# Altium PCB SPECCY2007.PcbDoc (part 1 of 2)
Units mil, origin at the board's own origin, x right, y up, seen from the top; angles counter-clockwise.
Board outline 6000 x 4400 mil, 2 copper layers (Top Layer, Bottom Layer); 54 components, 103 nets, 437 pads, 186 vias.
Unrouted connection lines stored in the file: 2.
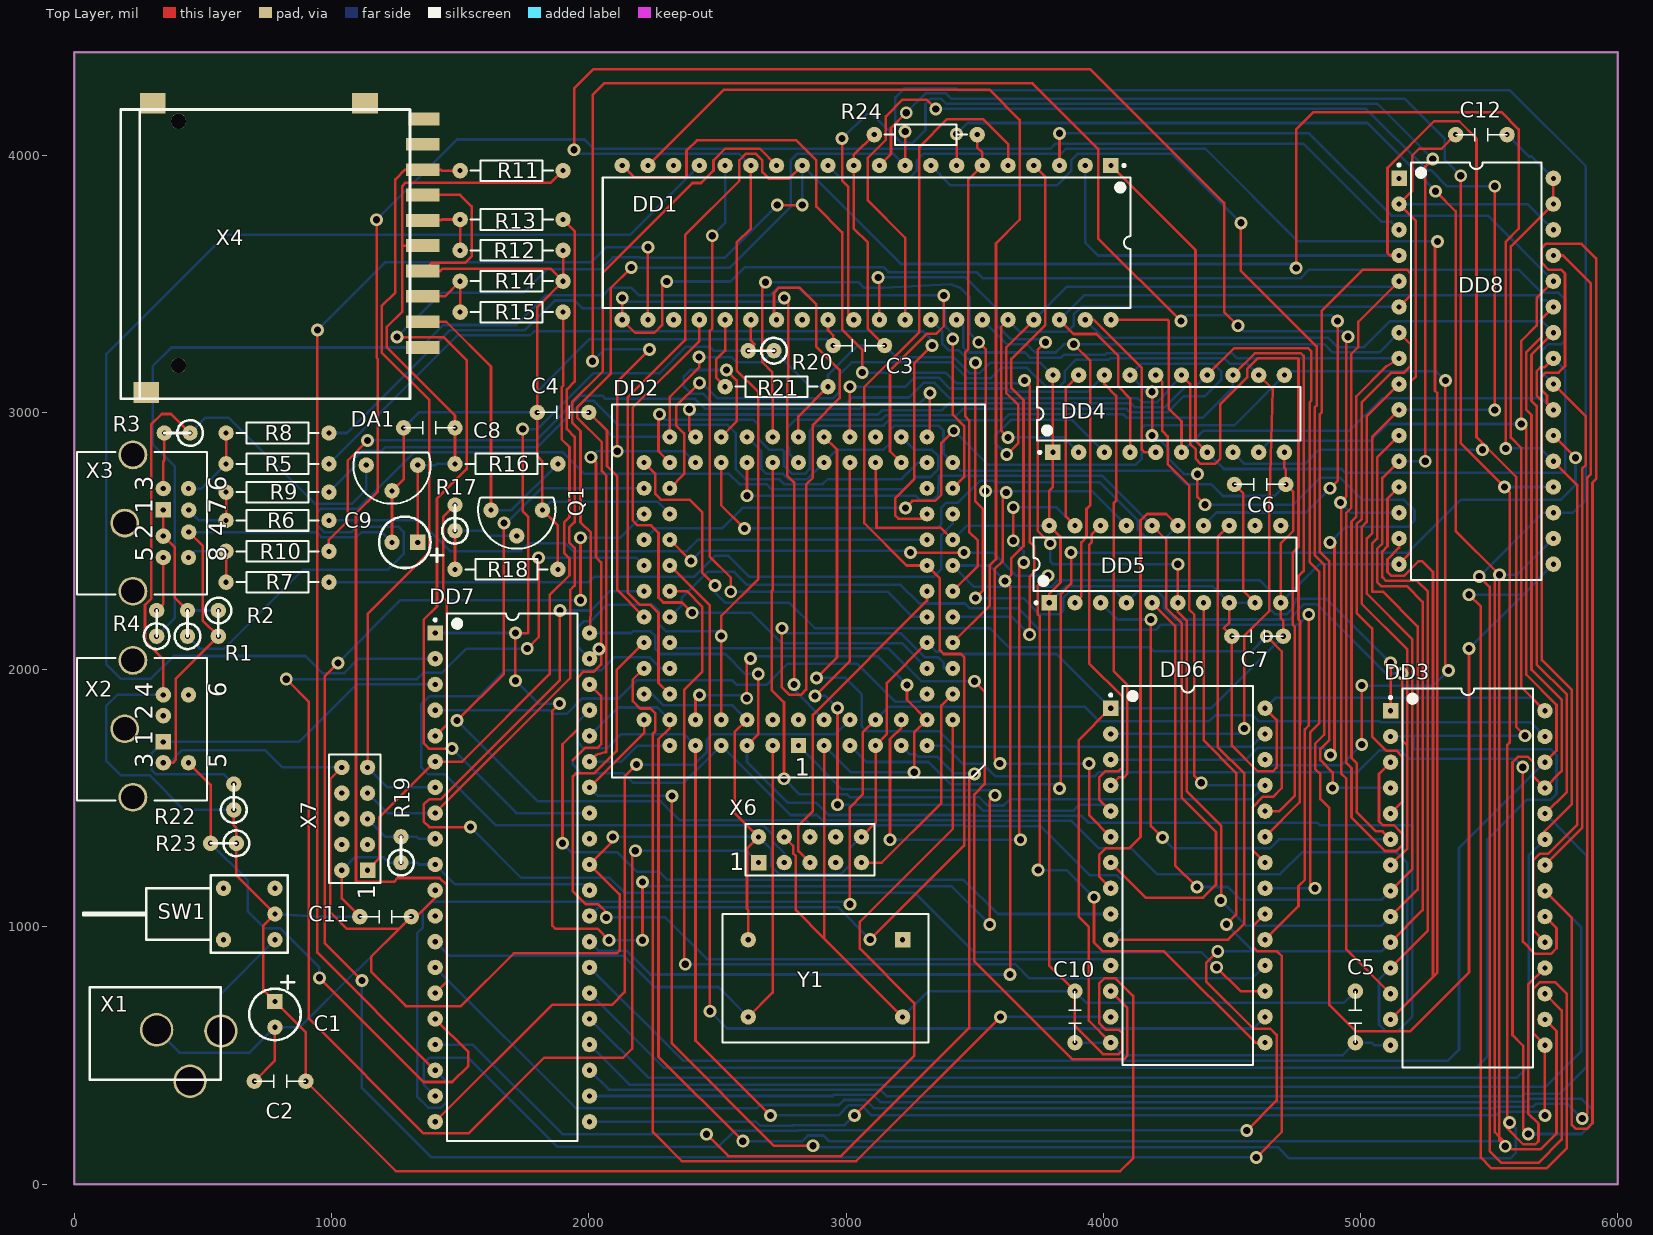
[diagram p0: Top Layer view]
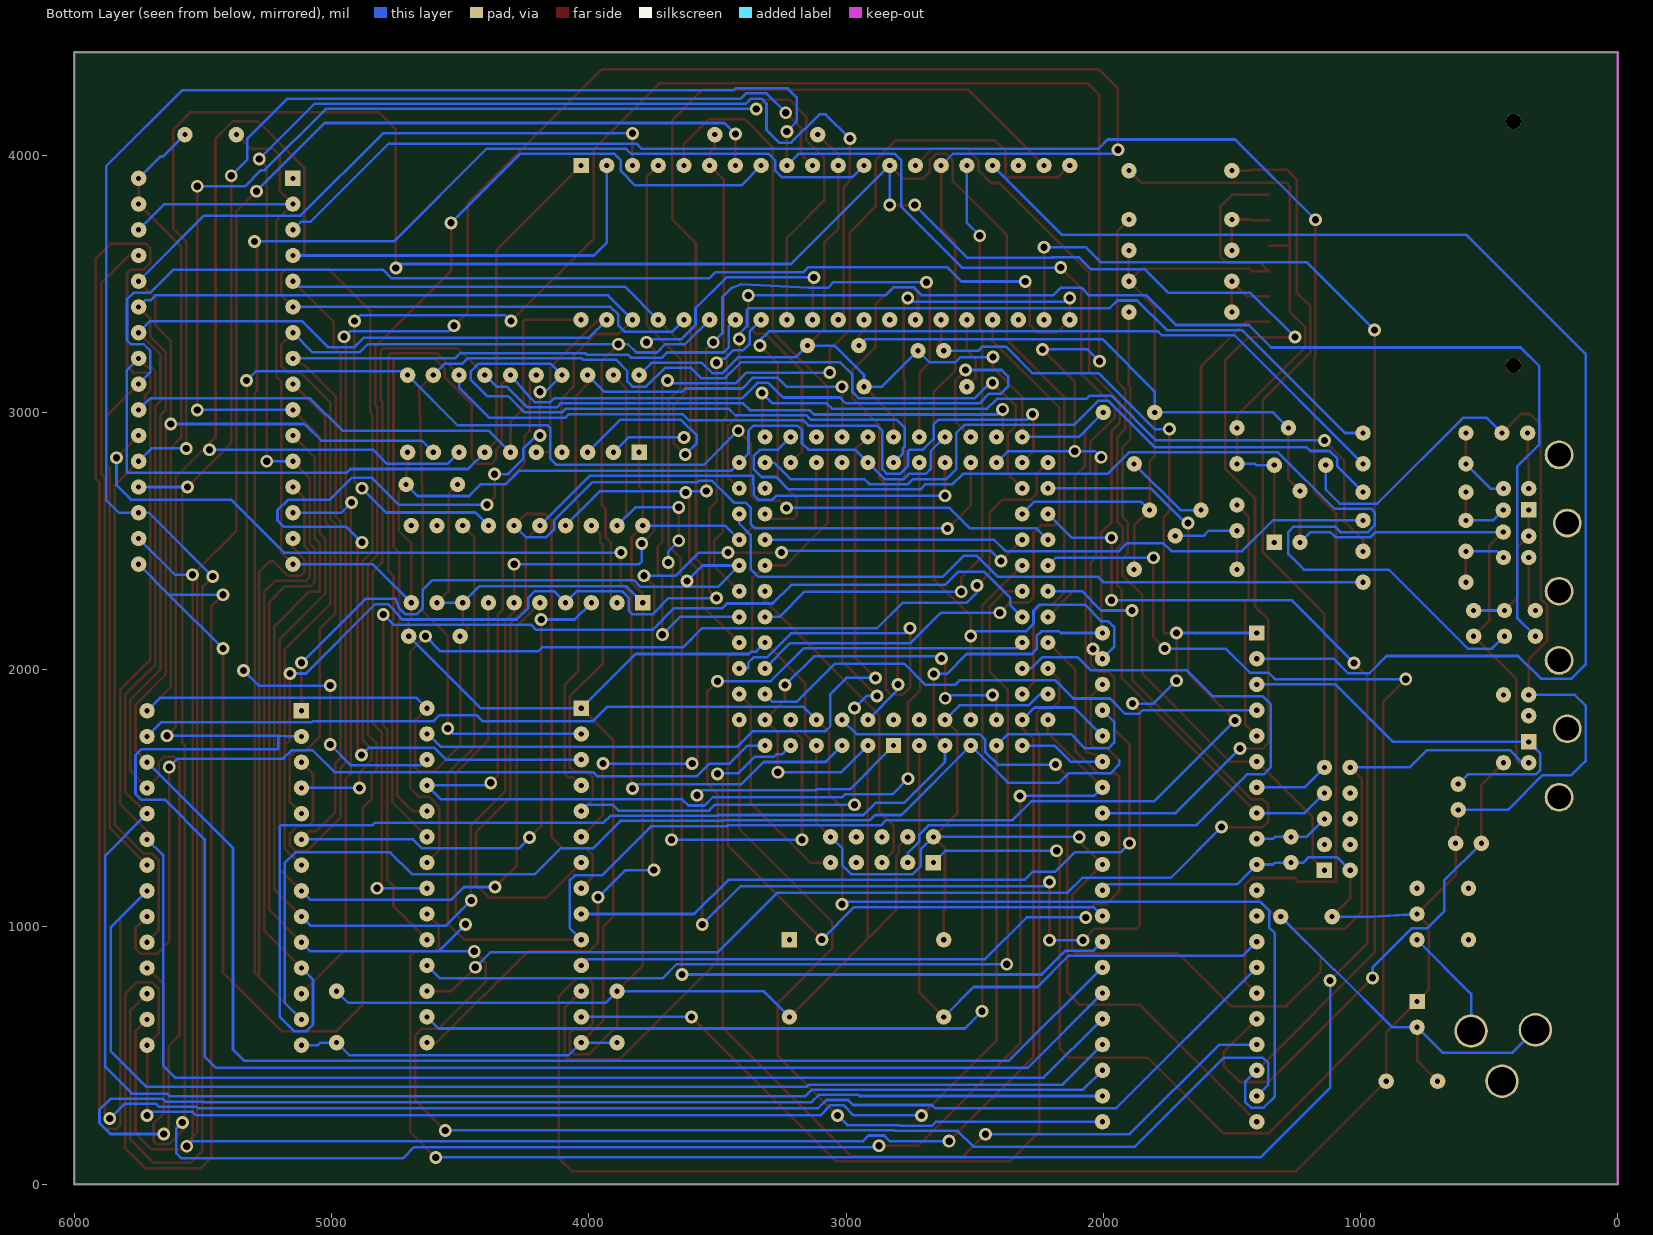
[diagram p1: Bottom Layer view, seen from below]
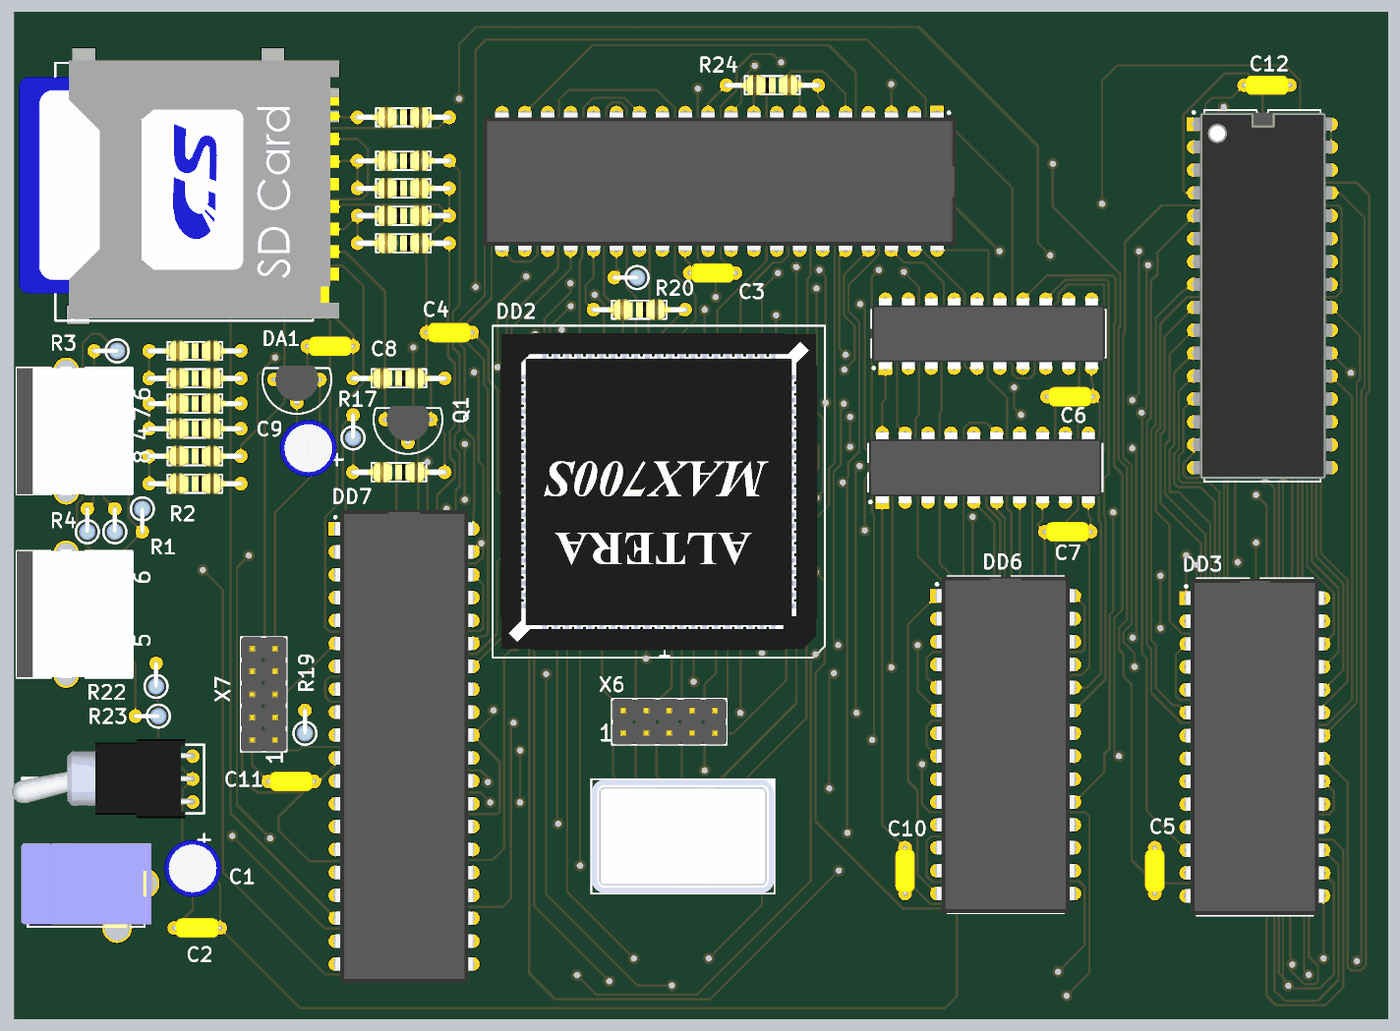
[diagram p3: 3D render of the assembled board from above, using the file's embedded part models]

## Layer stack, top to bottom
Top Layer: signal copper 1.4
Dielectric: dielectric 12.6, FR-4, Dk 4.8
Bottom Layer: signal copper 1.4

## Board outline
0,0 0,4400 6000,4400 6000,0 0,0

## Design rules (kind name [scope] priority, off if disabled: settings)
Clearance [All] p1: gap=10
HoleSize [All] p1: absolutevalues=TRUE maxlimit=200 minlimit=1 maxpercent=80.000 minpercent=20.000
HoleToHoleClearance [All] p1: gap=10 allowstackedmicrovias=FALSE
PlaneConnect [All] p1: planeconnectstyle=Direct reliefexpansion=20 reliefentries=4 reliefconductorwidth=10 reliefairgap=10
PolygonConnect [All] p1: connectstyle=Direct reliefconductorwidth=10 reliefentries=4 polygonreliefangle="90 Angle" airgapwidth=10
RoomDefinition SPECCY2007 [InComponentClass('SPECCY2007')] p1: confinementstyle=ConfineIn formatcopy=TRUE lockcomponents=FALSE outline -100,0 6000,0 6000,4400 -100,4400
RoutingVias [All] p1: holewidth=28 width=50 viastyle="Through Hole" minholewidth=28 minwidth=50 maxholewidth=28 maxwidth=50
SMDNeckDown [All] p1: percent=50.000
SilkToSolderMaskClearance SilkscreenOverComponentPads [IsPad] p1: minsilkscreentomaskgap=10 clearancetoexposedcopper=TRUE
SolderMaskExpansion [All] p1: expansion=4
Width [All] p1: maxlimit=10 minlimit=10 preferedwidth=10
24 further rules are at their usual default settings.

## Components (designator, comment, footprint, x,y, rotation, side; value= is the part's Value field where it differs from the comment)
C1 "47,0" CAPPOL_2.54#1 780,660 r270 top
C2 "0,1" CAP_5.08-7.8x3.2 800,400 r180 top
C3 "0,1" CAP_5.08-7.8x3.2 3050,3260 r180 top
C4 "0,1" CAP_5.08-7.8x3.2 1900,3000 r180 top
C5 "0,1" CAP_5.08-7.8x3.2 4980,650 r270 top
C6 "0,1" CAP_5.08-7.8x3.2 4610,2720 r0 top
C7 "0,1" CAP_5.08-7.8x3.2 4600,2130 r0 top
C8 "0,1" CAP_5.08-7.8x3.2 1380,2940 r180 top
C9 "47,0" CAPPOL_2.54#2 1280,2500 r180 top
C10 "0,1" CAP_5.08-7.8x3.2 3890,650 r270 top
C11 "0,1" CAP_5.08-7.8x3.2 1210,1040 r0 top
C12 "0,1" CAP_5.08-7.8x3.2 5470,4080 r180 top
DA1 "LP2950" TO92#1 1240,2740 r90 top
DD1 "Z80A" DIP-40 3080,3660 r180 top
DD2 "EPM7128S/PLCC" PLCC84-Socket+AlteraMAX700S 2820,2300 r90 top
DD3 "CY62256" DIP-28W 5417,1190.16 r270 top
DD4 "74HCT245" DIP-20 4254.29,2995 r0 top
DD5 "74HCT245" DIP-20 4240,2410 r0 top
DD6 "CY62256" DIP-28W 4329,1200.16 r270 top
DD7 "ATMEGA16" DIP-40 1703,1192.48 r270 top
DD8 "AT29C020" DIP-32/D41.2 5450,3160 r270 top
Q1 "BC557" TO92#2 1720,2570 r90 top
R1 "4K7" RES-2.54 440,2180 r90 top
R2 "2K2" RES-2.54 560,2180 r270 top
R3 "100" RES-2.54 400,2920 r180 top
R4 "330" RES-2.54 320,2180 r90 top
R5 "470" RES_10.16 790,2800 r180 top
R6 "470" RES_10.16 790,2580 r180 top
R7 "470" RES_10.16 790,2340 r180 top
R8 "330" RES_10.16 790,2920 r180 top
R9 "330" RES_10.16 790,2690 r180 top
R10 "330" RES_10.16 790,2460 r180 top
R11 "10K" RES_10.16 1700,3940 r180 top
R12 "2K2" RES_10.16 1700,3630 r0 top
R13 "1K" RES_10.16 1700,3750 r180 top
R14 "2K2" RES_10.16 1700,3510 r0 top
R15 "1K" RES_10.16 1700,3390 r180 top
R16 "10K" RES_10.16 1680,2800 r180 top
R17 "2K2" RES-2.54 1480,2590 r90 top
R18 "2K2" RES_10.16 1680,2390 r180 top
R19 "10K" RES-2.54 1270,1300 r90 top
R20 "10K" RES-2.54 2670,3240 r180 top
R21 "10K" RES_10.16 2730,3100 r180 top
R22 "4K7" RES-2.54 620,1505 r90 top
R23 "4K7" RES-2.54 580,1325 r180 top
R24 "2K2" RES_10.16 3310,4080 r0 top
SW1 "SW_T_SPDT" SW_T_SPDT 680,1040 r180 top locked
X1 "X3" "CONN JACK PWR" 420,500 r180 top locked
X2 "X6" Mini-DIN6 320,1770 r0 top locked
X3 "X8" Mini-DIN8 320,2570 r0 top locked
X4 "X9" "SD Card socket" 820,3640 r270 top locked
X6 "X10" "Double row pin strip 5 way" 2860,1300 r0 top
X7 "X10" "Double row pin strip 5 way" 1090,1420 r90 top
Y1 "14MHz" OSC14 2920,800 r180 top

## Footprints (in the part's own frame and the unit in brackets; to place one, negate y for a bottom-side part, rotate by r counter-clockwise, add the part's x,y. Pads: shape width x height; smd on the part's side, far side on the other; paste and mask are expansions set on the pad)
CAP_5.08-7.8x3.2 [mil] "Capacitor, Ceramic, Thru-Hole, Dipped Radial; Body 7.8 x 3.2 mm (WxT) Pin Spacing 5.08 mm (typ)"
  round 60 hole 20: 1(-100,0) 2(100,0)
  silkscreen extent -100,-25 100,25, body extent -110,-42 110,43, height 170
CAPPOL_2.54#1 [mil]
  round 60 hole 20: MINUS(50,0)
  rect 60x60 hole 20: PLUS(-50,0)
  silkscreen extent -150,-100 100,100, body extent -125,-125 125,125, height 454
CAPPOL_2.54#2 [mil]
  round 60 hole 20: MINUS(45,5)
  rect 60x60 hole 20: PLUS(-55,5)
  silkscreen extent -155,-95 95,105, body extent -130,-120 120,130, height 454
"CONN JACK PWR" [mil] "Разъем питания (штекер)"
  round 130 hole 110: 1(100,-100) 2(-30,100) 3(-150,-95)
  silkscreen extent -150,-265 360,95, body extent -188,-270 388,100, height 126
DIP-20 [mil] "DIP, 20-Pin, Row Spacing 7.62 mm, Pitch 2.54 mm"
  rect 60x60 hole 20: 1(-450,-150)
  round 60 hole 20: 2(-350,-150) 3(-250,-150) 4(-150,-150) 5(-50,-150) 6(50,-150) 7(150,-150) 8(250,-150) 9(350,-150) 10(450,-150) 11(450,150) 12(350,150) 13(250,150) 14(150,150) 15(50,150) 16(-50,150) 17(-150,150) 18(-250,150) 19(-350,150) 20(-450,150)
  silkscreen extent -512,-155 512,104, body extent -507,-155 508,155, height 185
DIP-28W [mil] "DIP, 28-Leads, Row Spacing 15.24mm, Pitch 2.54mm, Body 37x13.3mm, Window"
  rect 60x60 hole 20: 1(-650,-300)
  round 60 hole 20: 2(-550,-300) 3(-450,-300) 4(-350,-300) 5(-250,-300) 6(-150,-300) 7(-50,-300) 8(50,-300) 9(150,-300) 10(250,-300) 11(350,-300) 12(450,-300) 13(550,-300) 14(650,-300) 15(650,300) 16(550,300) 17(450,300) 18(350,300) 19(250,300) 20(150,300) 21(50,300) 22(-50,300) 23(-150,300) 24(-250,300) 25(-350,300) 26(-450,300) 27(-550,300) 28(-650,300)
  silkscreen extent -736,-305 736,254, body extent -735,-305 735,305, height 225
DIP-32/D41.2 [mil] "DIP, Ceramic, 32-Pin, Row Spacing 15.24 mm, Pitch 2.54 mm"
  rect 60x60 hole 20: 1(-750,-300)
  round 60 hole 20: 2(-650,-300) 3(-550,-300) 4(-450,-300) 5(-350,-300) 6(-250,-300) 7(-150,-300) 8(-50,-300) 9(50,-300) 10(150,-300) 11(250,-300) 12(350,-300) 13(450,-300) 14(550,-300) 15(650,-300) 16(750,-300) 17(750,300) 18(650,300) 19(550,300) 20(450,300) 21(350,300) 22(250,300) 23(150,300) 24(50,300) 25(-50,300) 26(-150,300) 27(-250,300) 28(-350,300) 29(-450,300) 30(-550,300) 31(-650,300) 32(-750,300)
  silkscreen extent -811,-305 811,254, body extent -800,-300 800,305, height 240
DIP-40 [mil] "DIP, 40-Pin, Row Spacing 15.24 mm, Pitch 2.54 mm"
  rect 60x60 hole 20: 1(-950,-300)
  round 60 hole 20: 2(-850,-300) 3(-750,-300) 4(-650,-300) 5(-550,-300) 6(-450,-300) 7(-350,-300) 8(-250,-300) 9(-150,-300) 10(-50,-300) 11(50,-300) 12(150,-300) 13(250,-300) 14(350,-300) 15(450,-300) 16(550,-300) 17(650,-300) 18(750,-300) 19(850,-300) 20(950,-300) 21(950,300) 22(850,300) 23(750,300) 24(650,300) 25(550,300) 26(450,300) 27(350,300) 28(250,300) 29(150,300) 30(50,300) 31(-50,300) 32(-150,300) 33(-250,300) 34(-350,300) 35(-450,300) 36(-550,300) 37(-650,300) 38(-750,300) 39(-850,300) 40(-950,300)
  silkscreen extent -1026,-305 1026,254, body extent -1032,-305 1032,305, height 224
"Double row pin strip 5 way" [mil] "Гребенка на 10 контактов"
  rect 60x60 hole 20: 1(-200,-50)
  round 60 hole 20: 2(-200,50) 3(-100,-50) 4(-100,50) 5(0,-50) 6(0,50) 7(100,-50) 8(100,50) 9(200,-50) 10(200,50)
  silkscreen extent -250,-100 250,100, body extent -250,-100 250,100, height 398
Mini-DIN6 [mil] "Штекер Mini-DIN 6 pin"
  rect 60x60 hole 20: 1(26,-51)
  round 60 hole 20: 2(26,51) 3(26,-132) 4(26,132) 5(124,-132) 6(124,132)
  round 112 / inner round 60 / far side round 112 hole 91: M1(-92,-266) M2(-124,0) M3(-92,266)
  silkscreen extent -309,-278 196,276, body extent -309,-282 203,282, height 518
Mini-DIN8 [mil] "Разъем Mini-DIN 8 pin"
  rect 60x60 hole 20: 1(26,51)
  round 60 hole 20: 2(26,-51) 3(26,134) 4(125,-35) 5(26,-134) 6(124,134) 7(125,50) 8(124,-134)
  round 112 / inner round 60 / far side round 112 hole 91: M1(-92,-265) M2(-124,0) M3(-92,265)
  silkscreen extent -309,-277 196,277, body extent -309,-282 203,282, height 518
OSC14 [mil] "Генератор"
  rect 60x60 hole 20: 1(-300,-150)
  round 60 hole 20: 7(300,-150) 8(300,150) 14(-300,150)
  silkscreen extent -400,-250 400,250, body extent -399,-248 399,248, height 193
PLCC84-Socket+AlteraMAX700S [mil] "Панелька для PLCC84"
  rect 58x58 hole 20: 1(-595,5)
  round 58 hole 20: 2(-495,5) 3(-595,-95) 4(-495,-95) 5(-595,-195) 6(-495,-195) 7(-595,-295) 8(-495,-295) 9(-595,-395) 10(-495,-395) 11(-595,-495) 12(-495,-595) 13(-495,-495) 14(-395,-595) 15(-395,-495) 16(-295,-595) 17(-295,-495) 18(-195,-595) 19(-195,-495) 20(-95,-595) 21(-95,-495) 22(5,-595) 23(5,-495) 24(105,-595) 25(105,-495) 26(205,-595) 27(205,-495) 28(305,-595) 29(305,-495) 30(405,-595) 31(405,-495) 32(505,-595) 33(605,-495) 34(505,-495) 35(605,-395) 36(505,-395) 37(605,-295) 38(505,-295) 39(605,-195) 40(505,-195) 41(605,-95) 42(505,-95) 43(605,5) 44(505,5) 45(605,105) 46(505,105) 47(605,205) 48(505,205) 49(605,305) 50(505,305) 51(605,405) 52(505,405) 53(605,505) 54(505,605) 55(505,505) 56(405,605) 57(405,505) 58(305,605) 59(305,505) 60(205,605) 61(205,505) 62(105,605) 63(105,505) 64(5,605) 65(5,505) 66(-95,605) 67(-95,505) 68(-195,605) 69(-195,505) 70(-295,605) 71(-295,505) 72(-395,605) 73(-395,505) 74(-495,605) 75(-595,505) 76(-495,505) 77(-595,405) 78(-495,405) 79(-595,305) 80(-495,305) 81(-595,205) 82(-495,205) 83(-595,105) 84(-495,105)
  silkscreen extent -720,-720 730,730, body extent -687,-687 697,697, height 349
RES-2.54 [mil] "Резистор вертикально"
  round 60 hole 20: 1(-50,0) 2(50,0)
  silkscreen extent -100,-50 50,50, body extent -86,-36 60,36, height 287
RES_10.16 [mil] "Резистор, Thru-Hole; 2 Leads; 0.4 in Pin Spacing"
  round 60 hole 20: 1(-200,0) 2(200,0)
  silkscreen extent -160,-40 160,40, body extent -212,-45 212,46, height 116
"SD Card socket" [mil] "Разъем SD карты"
  rect 50x130 smd: 1(287.5,535) 2(188.5,535) 3(90.5,535) 4(-8.5,535) 5(-106.5,535) 6(-205.5,535) 7(-303.5,535) 8(-402.5,535) 9(387.5,535)
  rect 50x120 smd: 10(-500.5,540)
  rect 80x100 smd: 11(-562.5,310) 12(-562.5,-515) 13(562.5,-540)
  round 60 hole 60: 14(457.5,-415) 15(-492.5,-415)
  silkscreen extent -538,-640 588,485, body extent -547,-798 579,600, height 118
SW_T_SPDT [mil] "Кнопка питания на плату"
  round 60 hole 20: 1(-100,90) 2(-100,-10) 3(-100,-110) 4(100,-110) 5(100,90)
  silkscreen extent -150,-160 645,140, body extent -111,-185 688,161, height 288
TO92#1 [mil] "TO, Flat Index; 3 In-Line, Axial Leads; Body Dia. 4.8mm; Leads 0.48 x 0.5 mm (max)"
  round 60 hole 20: 1(55,-95) 2(-45,5) 3(55,105)
  silkscreen extent -95,-145 105,155, body extent -56,-105 115,115, height 315
TO92#2 [mil] "TO, Flat Index; 3 In-Line, Axial Leads; Body Dia. 4.8mm; Leads 0.48 x 0.5 mm (max)"
  round 60 hole 20: 1(50,-100) 2(-50,0) 3(50,100)
  silkscreen extent -100,-150 100,150, body extent -61,-110 110,110, height 315

## Part data
C1 C9: library part "C POL"
C2 C3 C4 C5 C6 C7 C8 C10 C11 C12: library part C
Q1: library part "TRANS NPN"
R1 R2 R3 R4 R5 R6 R7 R8 R9 R10 R11 R12 R13 R14 R15 R16 R17 R18 R19 R20 R21 R22 R23 R24: library part R
X4: "SD Card socket"
Y1: library part OSC14

## Via types
v1: diameter 50, hole 28, Top Layer to Bottom Layer, tented both sides, 186 vias

## Nets (pads, with @x,y where several pads share a name; then routed paths per layer and width w, separated by ;. In a path a pad name is that pad's centre, name@x,y a point inside that pad or via, vN(x,y) a via of type N, cw(c..) or ccw(c..) an arc to the next point about the centre after c; other vN are vias at no path point)
A0: DD1.30 DD3.10 DD5.7 DD7.19 DD8.12 | length 13800.6
  Top Layer w10: v1(2985,4065) 2985,3901 3008,3878 3008,3382 DD1.30@3030,3360 ; DD5.7@4390,2260 4390,1726 4517,1599 4517,1048 v1(4479,1010) ; v1(4445,905) 4400,860 4400,788 4584,604 4650,604 4674,580 4674,325 v1(4558,209) ; DD3.10@5117,940.16 5242,1065.16 5242,2263 5180,2325 5080,2325 5065,2340 5065,2470 5085,2490 5085,2745 DD8.12@5150,2810 ; v1(5252,2810) 5252,3956 v1(5281,3985)
  Bottom Layer w10: DD7.19@1403,342.48 1358,387.48 1358,470 1380,492 1531,492 1877,146 2505,146 2566,207 2812,207 2814,209 v1(4558,209) ; v1(2985,4065) 3079,4159 3103,4159 3213,4049 3260,4049 3309,4098 3309,4200 3329,4220 3369,4220 3389,4200 5066,4200 v1(5281,3985) ; v1(4445,905) 4584,905 ; v1(4479,1010) 4584,905 ; DD3.10@5117,940.16 5081.84,905 ; DD8.12@5150,2810 v1(5252,2810) ; 4584,905 5081.84,905 ; 4584,905 5081.84,905
A1: DD1.31 DD3.9 DD5.6 DD8.11 | length 6491.4
  Top Layer w10: v1(3125,3525) 3130,3520 DD1.31@3130,3360 ; v1(3775,3273) 3745,3243 3745,2540 v1(3794,2491) ; v1(4290,2410) DD5.6@4290,2260 4290,2225 4325,2190 4325,1527 4458.33,1393.67 4458.33,1104.33 v1(4457,1103) ; DD3.9@5117,1040.16 5222,1145.16 5222,2168 5086.86,2303.14 5046.86,2303.14 5045,2305 5045,2490 5065,2510 5065,2825 DD8.11@5150,2910
  Bottom Layer w10: v1(3125,3525) 3465,3525 3585,3405 3585,3340 3640,3285 3763,3285 v1(3775,3273) ; v1(3794,2491) 3794,2420 3804,2410 v1(4290,2410) ; v1(4457,1103) 4555,1005 5081.84,1005 DD3.9@5117,1040.16
A2: DD1.32 DD3.8 DD5.5 DD8.10 | length 8650.1
  Top Layer w10: DD1.32@3230,3360 3230,3679 3085,3824 3085,3990 3155,4060 3155,4151 3220,4216 3313,4216 v1(3349,4180) ; DD5.5@4190,2260 4279.5,2170.5 4279.5,1239.5 v1(4364,1155) ; DD3.8@5117,1140.16 5202,1225.16 5202,2118.06 5025,2295.06 5025,2510 5045,2530 5045,2905 DD8.10@5150,3010 ; v1(5522,3010) v1(5522,3879)
  Bottom Layer w10: v1(3349,4180) 5021.57,4180 5260,3941.57 5273.43,3941.57 5336,3879 v1(5522,3879) ; v1(4364,1155) 4485.05,1155 4535.05,1105 5081.84,1105 DD3.8@5117,1140.16 ; DD8.10@5150,3010 v1(5522,3010)
A3: DD1.33 DD3.7 DD5.4 DD8.9 | length 5925.1
  Top Layer w10: v1(3503,2278) 3532.39,2307.39 3532.39,2624.61 3503,2654 v1(3503,3193) ; DD3.7@5117,1240.16 5182,1305.16 ; DD8.9@5150,3110 5024.16,2984.16 5024.16,2574.16 5005,2555 5005,2255.92 5182,2078.92 5182,1985 5182,1705.16 ; v1(5162,1985) 5162,1725.16 5182,1705.16 ; 5182,1305.16 5182,1705.16 ; 5182,1305.16 5182,1705.16
  Bottom Layer w10: DD1.33@3330,3360 3375,3315 3375,3266 3400,3241 3439,3241 3472,3208 3488,3208 v1(3503,3193) ; v1(3503,2278) 3690,2278 3753,2215 3830,2215 3845,2230 3845,2280 3870,2305 4045,2305 DD5.4@4090,2260 4135,2305 4210,2305 4235,2280 4235,2240 4280,2195 4726,2195 4759,2234 4780,2255 4830,2255 5100,1985 v1(5162,1985)
A4: DD1.34 DD3.6 DD5.3 DD8.8 | length 5882.7
  Top Layer w10: v1(4185,2195) 4185,1392 v1(4230,1347) ; DD3.6@5117,1340.16 5085.71,1371.45 5060,1371.45 4985,1446.45 4985,1636.85 4965,1656.85 4965,2576 4984.16,2595.16 4984.16,3062.87 5100,3178.71 DD8.8@5150,3210
  Bottom Layer w10: DD1.34@3430,3360 3455.82,3334.18 3455.82,3252.98 3475.8,3233 3695.08,3233 3715.09,3212.99 3835.09,3212.99 3847.1,3225 4007.14,3225 4012.14,3230 4500,3230 4520,3210 DD8.8@5150,3210 ; DD5.3@3990,2260 4055,2195 v1(4185,2195) ; v1(4230,1347) 4271.84,1305.16 4647.64,1305.16 4682.64,1340.16 DD3.6@5117,1340.16
A5: DD1.35 DD3.5 DD5.2 DD8.7 | length 4945.2
  Top Layer w10: v1(3885,3265) 3950,3200 3950,2640 3935,2625 3935,2515 3915,2495 3915,2285 DD5.2@3890,2260 ; DD3.5@5117,1440.16 5162,1485.16 5162,1663.16 5140,1685.16 5100,1685.16 5045,1740.16 5045,2160 4985,2220 4985,2565.36 5004.16,2584.52 5004.16,3039.16 5120,3155 5170,3155 5195,3180 5195,3265 DD8.7@5150,3310
  Bottom Layer w10: DD1.35@3530,3360 3625,3265 3703.08,3265 3735.09,3232.99 3815.09,3232.99 3847.1,3265 ; DD8.7@5150,3310 5073.74,3233.74 4891,3233.74 4859.74,3265 v1(3885,3265) ; 3847.1,3265 v1(3885,3265) ; 3847.1,3265 v1(3885,3265)
A6: DD1.36 DD3.4 DD4.2 DD8.6 | length 5081
  Top Layer w10: v1(3630,2903) 3603,2930 3603,3333 DD1.36@3630,3360 ; v1(4891.84,1540.16) 4891.84,1600.11 4844,1647.95 4844,1692 4879,1727 4879,2420.68 4842,2457.68 4842,2992.71 4849.29,3000 4849.29,3394.29 5010,3555 5180,3555 5195,3540 5195,3455 DD8.6@5150,3410
  Bottom Layer w10: v1(3630,2903) 3846.29,2903 DD4.2@3904.29,2845 ; DD1.36@3630,3360 3677,3313 3860,3313 3885,3338 3885,3380 3915,3410 DD8.6@5150,3410 ; v1(4891.84,1540.16) DD3.4@5117,1540.16
A7: DD1.37 DD3.3 DD4.3 DD8.5 | length 5522.6
  Top Layer w10: v1(3625,2837) 3670,2882 3670,3028 3623,3075 3623,3253 DD1.37@3730,3360 ; DD3.3@5117,1640.16 5072,1595.16 5072,1410 5086.84,1395.16 5130,1395.16 5162,1363.16 5162,1317.16 5140,1295.16 5095.84,1295.16 4965,1426 4965,1616.85 4945,1636.85 4945,2610 4964.16,2629.16 4964.16,3226.5 4991.41,3253.74 4991.41,3351.41 DD8.5@5150,3510
  Bottom Layer w10: v1(3625,2837) 3580,2882 3580,2909.98 3641.02,2971 3878.29,2971 DD4.3@4004.29,2845 ; DD1.37@3730,3360 3858,3488 5128,3488 DD8.5@5150,3510
A8: DD1.38 DD3.25 DD4.4 DD7.22 DD8.27 | length 10597.6
  Top Layer w10: DD1.38@3830,3360 3885,3305 3973.29,3305 4059,3219.29 4059,3100 4104.29,3054.71 DD4.4@4104.29,2845 ; v1(5652,195) 5632,215 5632,538 5591,579 5591,1640 5612,1661 5651,1661 5672,1640 5672,1585.16 DD3.25@5717,1540.16 5782,1605.16 5782,1883.16 5665,2000.16 5665,2990 5645,3010 5645,3234.33 5705,3294.33 5705,3365 DD8.27@5750,3410
  Bottom Layer w10: DD7.22@2003,342.48 2948.48,342.48 2953,347 3106,347 3134,319 5498.09,319 5500,320.91 5645.25,320.91 5656,331.66 5860,331.66 5902,289.66 5902,237 5860,195 v1(5652,195) ; DD1.38@3830,3360 3925,3455 5685,3455 5704.22,3435.78 5724.22,3435.78 DD8.27@5750,3410
A9: DD1.39 DD3.24 DD4.5 DD7.23 DD8.26 | length 9612.6
  Top Layer w10: DD1.39@3930,3360 3963.29,3360 4150,3173.29 4150,2855 4160,2845 DD4.5@4204.29,2845 ; DD3.24@5717,1440.16 5802,1525.16 5802,1903.16 5685,2020.16 5685,3025 5665,3045 5665,3225 DD8.26@5750,3310
  Bottom Layer w10: DD7.23@2003,442.48 2078.48,367 3133,367 3158,342 5629.34,342 5639,351.66 5776.15,351.66 5879,454.51 5879,1278.16 DD3.24@5717,1440.16 ; DD1.39@3930,3360 3999,3291 4873.74,3291 4911,3253.74 5013.74,3253.74 5115,3355 5705,3355 DD8.26@5750,3310
A10: DD1.40 DD3.21 DD4.6 DD7.24 DD8.23 | length 12410.6
  Top Layer w10: DD1.40@4030,3360 4250,3360 4254,3356 4254,3016 4304.29,2965.71 DD4.6@4304.29,2845 ; DD3.21@5717,1140.16 5822,1035.16 5822,230 5837,215 5880,215 5902,237 5902,2727.47 5916,2741.47 5916,3599 5860,3655 5720,3655 5705,3640 5705,3580 5730,3555 5780,3555 5795,3540 5795,3180 5770,3155 5720,3155 5705,3140 5705,3085 5725,3065 5725,3035 DD8.23@5750,3010
  Bottom Layer w10: DD7.24@2003,542.48 2158.48,387 3145,387 3153,379 5721,379 5859,517 5859,998.16 DD3.21@5717,1140.16 ; DD4.6@4304.29,2845 4387.29,2928 4955.81,2928 5082.81,3055 5705,3055 DD8.23@5750,3010
A11: DD1.1 DD3.23 DD4.7 DD7.25 DD8.25 | length 9832.5
  Top Layer w10: DD1.1@4030,3960 4358.73,3631.27 4358.73,2890.56 DD4.7@4404.29,2845 ; DD3.23@5717,1340.16 5717,1373 5822,1478 5822,1920.27 5705,2037.27 5705,3045 5685,3065 5685,3160 5700,3175 5715,3175 DD8.25@5750,3210
  Bottom Layer w10: DD7.25@2003,642.48 2231.48,414 5608,414 5654,460 5654,1277.16 DD3.23@5717,1340.16 ; DD4.7@4404.29,2845 4469.29,2780 4927,2780 4942,2765 5791,2765 5795.64,2769.64 5795.64,3164.36 DD8.25@5750,3210
A12: DD1.2 DD3.2 DD4.8 DD7.26 DD8.4 | length 11947.2
  Top Layer w10: DD8.4@5150,3610 5115,3610 5105,3620 5105,3951 5286,4132 5384,4132 5451,4065 5451,2904 ; v1(5474,2855) 5474,2881 ; v1(5640,1743) 5605,1778 5605,2750 5487,2868 5474,2881 ; 5451,2904 5474,2881 ; 5451,2904 5474,2881
  Bottom Layer w10: DD7.26@2003,742.48 2293.48,452 5449,452 5493,496 5493,1340 5648,1495 5740,1495 5762,1517 5762,1668 5740,1690 5206.65,1690 5206.65,1743 ; DD1.2@3930,3960 3930,3660 3980,3610 DD8.4@5150,3610 ; DD4.8@4504.29,2845 4549.29,2800 4784,2800 4839,2855 v1(5474,2855) ; DD3.2@5117,1740.16 5119.84,1743 5156.5,1740.16 5206.65,1743 ; v1(5640,1743) 5206.65,1743
A13: DD1.3 DD3.26 DD4.9 DD7.27 DD8.28 | length 10155.8
  Top Layer w10: DD1.3@3830,3960 v1(3830,4085) ; DD3.26@5717,1640.16 5762,1685.16 5762,1863.16 5645,1980.16 5645,2945 5635,2945 v1(5625,2955) 5625,3278 5685,3338 5685,3445 DD8.28@5750,3510
  Bottom Layer w10: DD7.27@2003,842.48 2365.48,480 5340,480 5383,523 5383,1306.16 DD3.26@5717,1640.16 ; v1(3830,4085) 4800,4085 5120,3765 5495,3765 DD8.28@5750,3510 ; DD4.9@4604.29,2845 4649.29,2890 5040,2890 5105,2955 v1(5625,2955)
A14: DD1.4 DD2.24 DD3.1 DD7.28 | length 7359.9
  Top Layer w10: v1(3638,815) 3638,2325 v1(3618,2345) 3641.77,2368.77 3641.77,2431.77 3690,2480 3690,3048 3643,3095 3643,3208 3775,3340 3775,3915 DD1.4@3730,3960 ; DD3.1@5117,1840.16 v1(5117,2026.65)
  Bottom Layer w10: DD7.28@2003,942.48 2037.48,908 2146.68,908 2239.68,815 v1(3638,815) ; v1(3618,2345) 3558,2405 DD2.24@3415,2405 3498.07,2321.93 3618,2321.93 3798.93,2321.93 3825,2348 4608,2348 4645,2311 4645,2240 4670,2215 4712.29,2215 4739,2241.71 4750,2275 4868.65,2275 v1(5117,2026.65)
A15: DD1.5 DD2.25 DD7.29 | length 5237.5
  Top Layer w10: v1(3094,951) 3459,1316 3459,2049 3447,2061 3380,2061 3365,2076 3365,2355 DD2.25@3315,2405 3236,2405 3071,2570 3071,3098 3285,3312 3285,4032 3393,4140 3533,4140 3630,4043 DD1.5@3630,3960
  Bottom Layer w10: DD7.29@2003,1042.48 2037.52,1077 2968,1077 v1(3094,951)
AVR_INT: DD2.9 DD7.17 | length 3787.7
  Top Layer w10: v1(2458,194) 2543,109 2981,109 3479,607 3479,1575 v1(3499,1595)
  Bottom Layer w10: DD7.17@1403,542.48 1548.52,542.48 1897,194 v1(2458,194) ; DD2.9@3215,1705 3249,1671 3271,1671 3281,1661 3355.38,1661 3419.38,1597 3497,1597 v1(3499,1595)
AVR_NOINT: DD2.6 DD7.20 | length 2778.4
  Top Layer w10: DD7.20@1403,242.48 1857.52,697 2090,697 2139.64,746.64 2139.64,1584.88 v1(2185.77,1631)
  Bottom Layer w10: v1(2185.77,1631) 2410,1631 2459,1680 2459,1728 2480,1749 2959,1749 DD2.6@3015,1805
AVR_RST: DD7.9 R19.2 X7.5 | length 295.1
  Bottom Layer w10: X7.5@1140,1420 1210,1350 R19.2@1270,1350 1332,1350 1339.52,1342.48 DD7.9@1403,1342.48
AVR_WAIT: DD2.15 DD7.4 | length 2087.4
  Bottom Layer w10: DD7.4@1403,1842.48 1846.45,1842.48 1860.93,1828 1914.45,1828 1974.45,1888 2116,1888 2186,1958 2559.39,1958 2576.8,1940.59 2690.59,1940.59 2773.57,2023.57 3043.58,2023.57 3192.15,1875 3285,1875 DD2.15@3315,1905
B: DD2.33 R10.1 | length 2971.3
  Top Layer w10: R10.1@990,2460 990,2505 1063,2578 1063,2814 v1(1140,2891) ; DD2.33@3315,2905 3326,2916 v1(3326,3075)
  Bottom Layer w10: v1(1140,2891) 1794,2891 1968,3065 2053,3065 2065,3053 2413,3053 2451,3015 3055,3015 3075,3035 3286,3035 v1(3326,3075)
BB: DD2.28 R7.1 | length 2701.7
  Bottom Layer w10: R7.1@990,2340 1999,2340 2020,2361 2410,2361 2492,2443 2542,2443 2624,2361 3340,2361 3371,2392 3371,2523.82 3415,2567.82 DD2.28@3415,2605
BG: DD2.27 R6.1 | length 2417.2
  Bottom Layer w10: R6.1@990,2580 1341,2580 1460,2461 1735.26,2461 1765,2490.74 1909.26,2490.74 1939,2461 2380,2461 2424,2505 DD2.27@3315,2505
BR: DD2.29 R5.1 | length 3455.9
  Top Layer w10: DD2.29@3315,2605 3312,2608 3291,2587 3204,2587 3191,2600 3191,2666 3265,2740 3265,3190 v1(3335,3260)
  Bottom Layer w10: R5.1@990,2800 1490,3300 1772.5,3300 1787.5,3315 3300,3315 3340,3275 3340,3265 v1(3335,3260)
BUSRQ: DD1.25 R21.2 | length 289
  Top Layer w10: R21.2@2530,3100 2495,3135 2495,3205 2530,3240 DD1.25@2530,3360
CLK: DD2.83 DD7.13 Y1.8 | length 2432.5
  Top Layer w10: Y1.8@2620,650 2715,745 DD2.83@2715,1705
  Bottom Layer w10: DD7.13@1403,942.48 1457.48,888 2134,888 2255.56,766.44 2503.56,766.44 Y1.8@2620,650
CLK_CPU: DD1.6 DD2.22 R24.2 | length 1871.8
  Top Layer w10: DD2.22@3415,2305 3512.39,2402.39 3512.39,2501.61 3479,2535 3479,2969.27 3463,2985.27 3463,3233 3476,3246 3476,3906 DD1.6@3530,3960 3530,4010 3510,4030 R24.2@3510,4080
D0: DD1.14 DD2.81 DD3.11 DD7.40 DD8.13 | length 9456.3
  Top Layer w10: DD7.40@2003,2142.48 2008,2230.03 2008,2532.78 1968,2572.78 1968,2927 1935,2960 1935,3040 2055,3160 2055,3544 2403,3892 2437,3892 2485,3940 2485,3980 2530,4025 2665,4025 DD1.14@2730,3960 ; DD2.81@2615,1705 2659,1749 v1(2659,1983.42) ; DD3.11@5117,840.16 5262,985.16 5262,2303 5220,2345 5100,2345 5085,2360 5085,2460 5105,2480 5105,2665 DD8.13@5150,2710
  Bottom Layer w10: DD7.40@2003,2142.48 2164.48,2142.48 2171,2149 2240,2149 2259,2130 2259,2079.74 2277.74,2061 2530.68,2061 2608.25,1983.42 v1(2659,1983.42) ; DD2.81@2615,1705 2615,1641 2773,1483 2884,1483 2932,1435 3499,1435 3502,1432 3916,1432 3942.84,1405.16 4831.84,1405.16 4842,1395 5198,1395 5202,1391 5202,652 5145,595 5097,595 5072,620 5072,795.16 DD3.11@5117,840.16
D1: DD1.15 DD2.80 DD3.12 DD7.39 DD8.14 | length 11022.2
  Top Layer w10: v1(1943,4021) 1943,4260 2017,4334 3950,4334 4470,3814 4470,3391 v1(4524,3337) ; DD1.15@2630,3960 2630,3715 2575,3660 2575,3163.29 2659,3079.29 2659,2353 2515,2209 v1(2515,2131) ; v1(4922,2650) 4944,2672 4944,3287 v1(4951,3294) ; v1@4925,2647 4925,1596.85 4944,1577.85 4944,913.16 DD3.12@5117,740.16 ; v1(2515,2131) DD2.80@2515,1805 v1(2515,2131)
  Bottom Layer w10: v1(1943,4021) 1959,4005 2585,4005 DD1.15@2630,3960 ; DD7.39@2003,2042.48 1958,2087.48 1958,2166 1980,2188 2006,2188 2071,2253 2248,2253 2271,2230 2271,2178 2300,2149 2497,2149 v1(2515,2131) ; v1(4524,3337) 4546,3315 4930,3315 v1(4951,3294) ; v1(4922,2650) 4962,2610 ; v1@4925,2647 4962,2610 ; DD8.14@5150,2610 4962,2610
D2: DD1.12 DD2.79 DD3.13 DD7.38 DD8.15 | length 12524.8
  Top Layer w10: 1938,1648 1987,1697 2035,1697 2048,1710 2048,1897.48 DD7.38@2003,1942.48 ; DD8.15@5150,2510 5150,2474 5105,2429 5105,2380 5120,2365 5168.64,2365 5224.64,2421 5241,2421 5282,2380 5282,805.16 ; v1(5299,3665) 5289.6,3655.6 5289.6,3084.08 5299,3074.68 5299,822.16 5282,805.16 ; 5282,805.16 DD3.13@5117,640.16 5282,805.16
  Bottom Layer w10: 1938,1648 1938,1631 1972,1597 2135,1597 2171,1561 2371,1561 DD2.79@2515,1705 2785,1435 2887,1435 2907,1415 3479,1415 3482,1412 3877.16,1412 3984,1305.16 4109.44,1305.16 4209.44,1205.16 4687.64,1205.16 4772.48,1290 5140,1290 5182,1248 5182,705.16 DD3.13@5117,640.16 ; DD1.12@2930,3960 2975,3915 3250,3915 3275,3940 3275,3980 3300,4005 3834.9,4005 3854.9,4025 4397,4025 4757,3665 v1(5299,3665)
  other v1: 2040,2080
D3: DD1.8 DD2.77 DD3.15 DD7.37 DD8.17 | length 16548.2
  Top Layer w10: DD2.77@2415,1705 2415,558 v1(2706,267) ; v1(4535,3737) 4535,3550.61 4829.29,3256.31 4829.29,3026.76 4822,3019.47 4822,2445.68 4859,2408.68 4859,1747 4824,1712 4824,1614 4843.95,1594.05 4843.95,1497.05 4879,1462 4879,696 4980,595 5194,595 5422,823 v1(5422,2082) ; v1(5422,2291) 5468,2245 5468,102.81 5508.29,62.52 5724.52,62.52 5802,140 5802,740 5756.84,785.16 5697.16,785.16 5672,760 5672,585.16 DD3.15@5717,540.16 v1(5717,267)
  Bottom Layer w10: DD7.37@2003,1842.48 1958,1797.48 1958,1716 1980,1694 2071,1694 2126,1749 2371,1749 DD2.77@2415,1705 ; v1(2706,267) 2970,267 3010,307 3060,307 3100,267 5526.09,267 5540,280.91 5703.09,280.91 v1(5717,267) ; DD1.8@3330,3960 3407,3883 3820,3883 3875,3938 3875,3980 3900,4005 4267,4005 v1(4535,3737) ; v1(5422,2082) 5631,2291 ; v1(5422,2291) 5631,2291 ; 5631,2291 DD8.17@5750,2410 5631,2291
D4: DD1.7 DD2.76 DD3.16 DD7.36 DD8.18 | length 14295.2
  Top Layer w10: DD2.76@2315,1805 2315,1774 2271,1730 2271,495 v1(2599,167) ; DD1.7@3430,3960 v1(3430,4082) ; v1(5292,3860) 5370,3782 5370,2539 v1(5540,2369) ; v1(5563,147) 5540,170 5540,184 ; DD3.16@5717,640.16 5762,595.16 5762,197 5700,135 5589,135 5570,154 5540,184 ; 5540,184 v1(5540,2369) ; 5540,184 5522,202 5522,2351 v1(5540,2369)
  Bottom Layer w10: DD7.36@2003,1742.48 2113.52,1853 2267,1853 DD2.76@2315,1805 ; v1(2599,167) 2830,167 2852,189 2912,189 2934,167 5543,167 v1(5563,147) ; v1(3430,4082) 3473,4125 5027,4125 v1(5292,3860) ; v1(5540,2369) 5609,2369 DD8.18@5750,2510
D5: DD1.9 DD2.75 DD3.17 DD7.35 DD8.19 | length 11924.9
  Top Layer w10: DD7.35@2003,1642.48 2030.09,1669.58 2068,1680 2068,2754.58 2051,2771.58 2051,2884 1955,2980 1955,3020 2085,3150 2085,3482.69 v1(2165.31,3563) ; DD1.9@3230,3960 v1(3230,4092) ; v1(5462,2362) 5502,2322 5502,128.48 5547.95,82.52 5691.63,82.52 5782,172.89 5782,675.16 DD3.17@5717,740.16
  Bottom Layer w10: DD7.35@2003,1642.48 2127,1642.48 2189.52,1705 DD2.75@2315,1705 ; v1(2165.31,3563) 2549.2,3563 2785,3798.8 2785,3980 2810,4005 3185,4005 DD1.9@3230,3960 ; v1(3230,4092) 3192,4130 3192,4225 3227,4260 3429,4260 3436,4253 5580,4253 5876,3957 5876,2660 5826,2610 DD8.19@5750,2610 5710,2610 v1(5462,2362)
D6: DD1.10 DD2.74 DD3.18 DD7.34 DD8.20 | length 13706.6
  Top Layer w10: DD7.34@2003,1542.48 2215,1754.48 DD2.74@2215,1805 ; v1(2323,1509) 2323,547 2721,149 v1(2872,149) ; DD1.10@3130,3960 3175,4005 3175,4106 v1(3234,4165) ; v1(5390,3920) 5390,2880 v1(5560,2710) 5580,2690 ; 5571,1708 5580,1717 ; v1(5580,240) v1@5571,249 ; 5580,1716.96 5571,1707.96 v1@5571,249 ; DD3.18@5717,840.16 5652,775.16 5652,275 5692,235 5692,167 5680,155 5632.5,155 5571,216.5 5571,240 v1@5571,249 ; 5580,1717 5580,2690 ; 5580,1717 5580,2690
  Bottom Layer w10: DD7.34@2003,1542.48 2036.48,1509 v1(2323,1509) ; v1(2872,149) 2877,144 4679,144 4723,100 5583,100 5603,120 5603,217 v1(5580,240) ; v1(3234,4165) 3309,4240 3389,4240 3409,4220 5170.56,4220 5328.46,4062.1 5328.46,3981.54 v1(5390,3920) ; v1(5560,2710) DD8.20@5750,2710
D7: DD1.13 DD2.73 DD3.19 DD7.33 DD8.21 | length 14282.1
  Top Layer w10: v1(1255,3293) 1435,3293 1525,3203 1525,2780 1410,2665 1410,2246 1358,2194 1358,1714 1379,1693 v1(1468,1693) ; DD2.73@2315,1905 2271,1949 2271,2221 2240,2252 2199,2252 2151,2300 2151,3057.51 2375,3281.51 2375,3690 2585,3900 2585,3980 2610,4005 2650,4005 2675,3980 2675,3934 2700,3909 2779,3909 DD1.13@2830,3960 ; v1(2733,3806) v1(2830,3806) ; v1(4750,3562) 4750,4100 4817,4167 5548,4167 5615,4100 5615,3714 5565,3664 v1(5565,2860) ; DD3.19@5717,940.16 5672,985.16 5672,1260 5697.16,1285.16 5730.16,1285.16 5842,1397 5842,2718 DD8.21@5750,2810
  Bottom Layer w10: v1(1255,3293) 1427,3465 1746,3465 1837,3556 2047,3556 2094,3603 2198,3603 2200,3601 2528,3601 v1(2733,3806) ; v1(1468,1693) 1718.52,1442.48 DD7.33@2003,1442.48 ; v1(2830,3806) DD1.13@2830,3960 3213,3577 4735,3577 v1(4750,3562) ; v1(5565,2860) 5700,2860 DD8.21@5750,2810
G: DD2.34 R9.1 | length 2741.2
  Bottom Layer w10: R9.1@990,2690 1090,2790 1090,2820 1120,2850 1195,2850 1210,2865 1800,2865 1980,3045 2020,3045 2113,2952 2540,2952 2571,2921 2571,2780 2610,2741 2739,2741 2759,2721 2909,2721 2929,2741 3216,2741 3280,2805 DD2.34@3315,2805